# Altium PCB PCBnew.PcbDoc (part 1 of 2)
Units mil, origin at the board's own origin, x right, y up, seen from the top; angles counter-clockwise.
Board outline 9000 x 6005 mil, 4 copper layers (Top Layer, Power, Ground, Bottom Layer); 260 components, 178 nets, 1017 pads, 903 vias.
Unrouted connection lines stored in the file: 485.
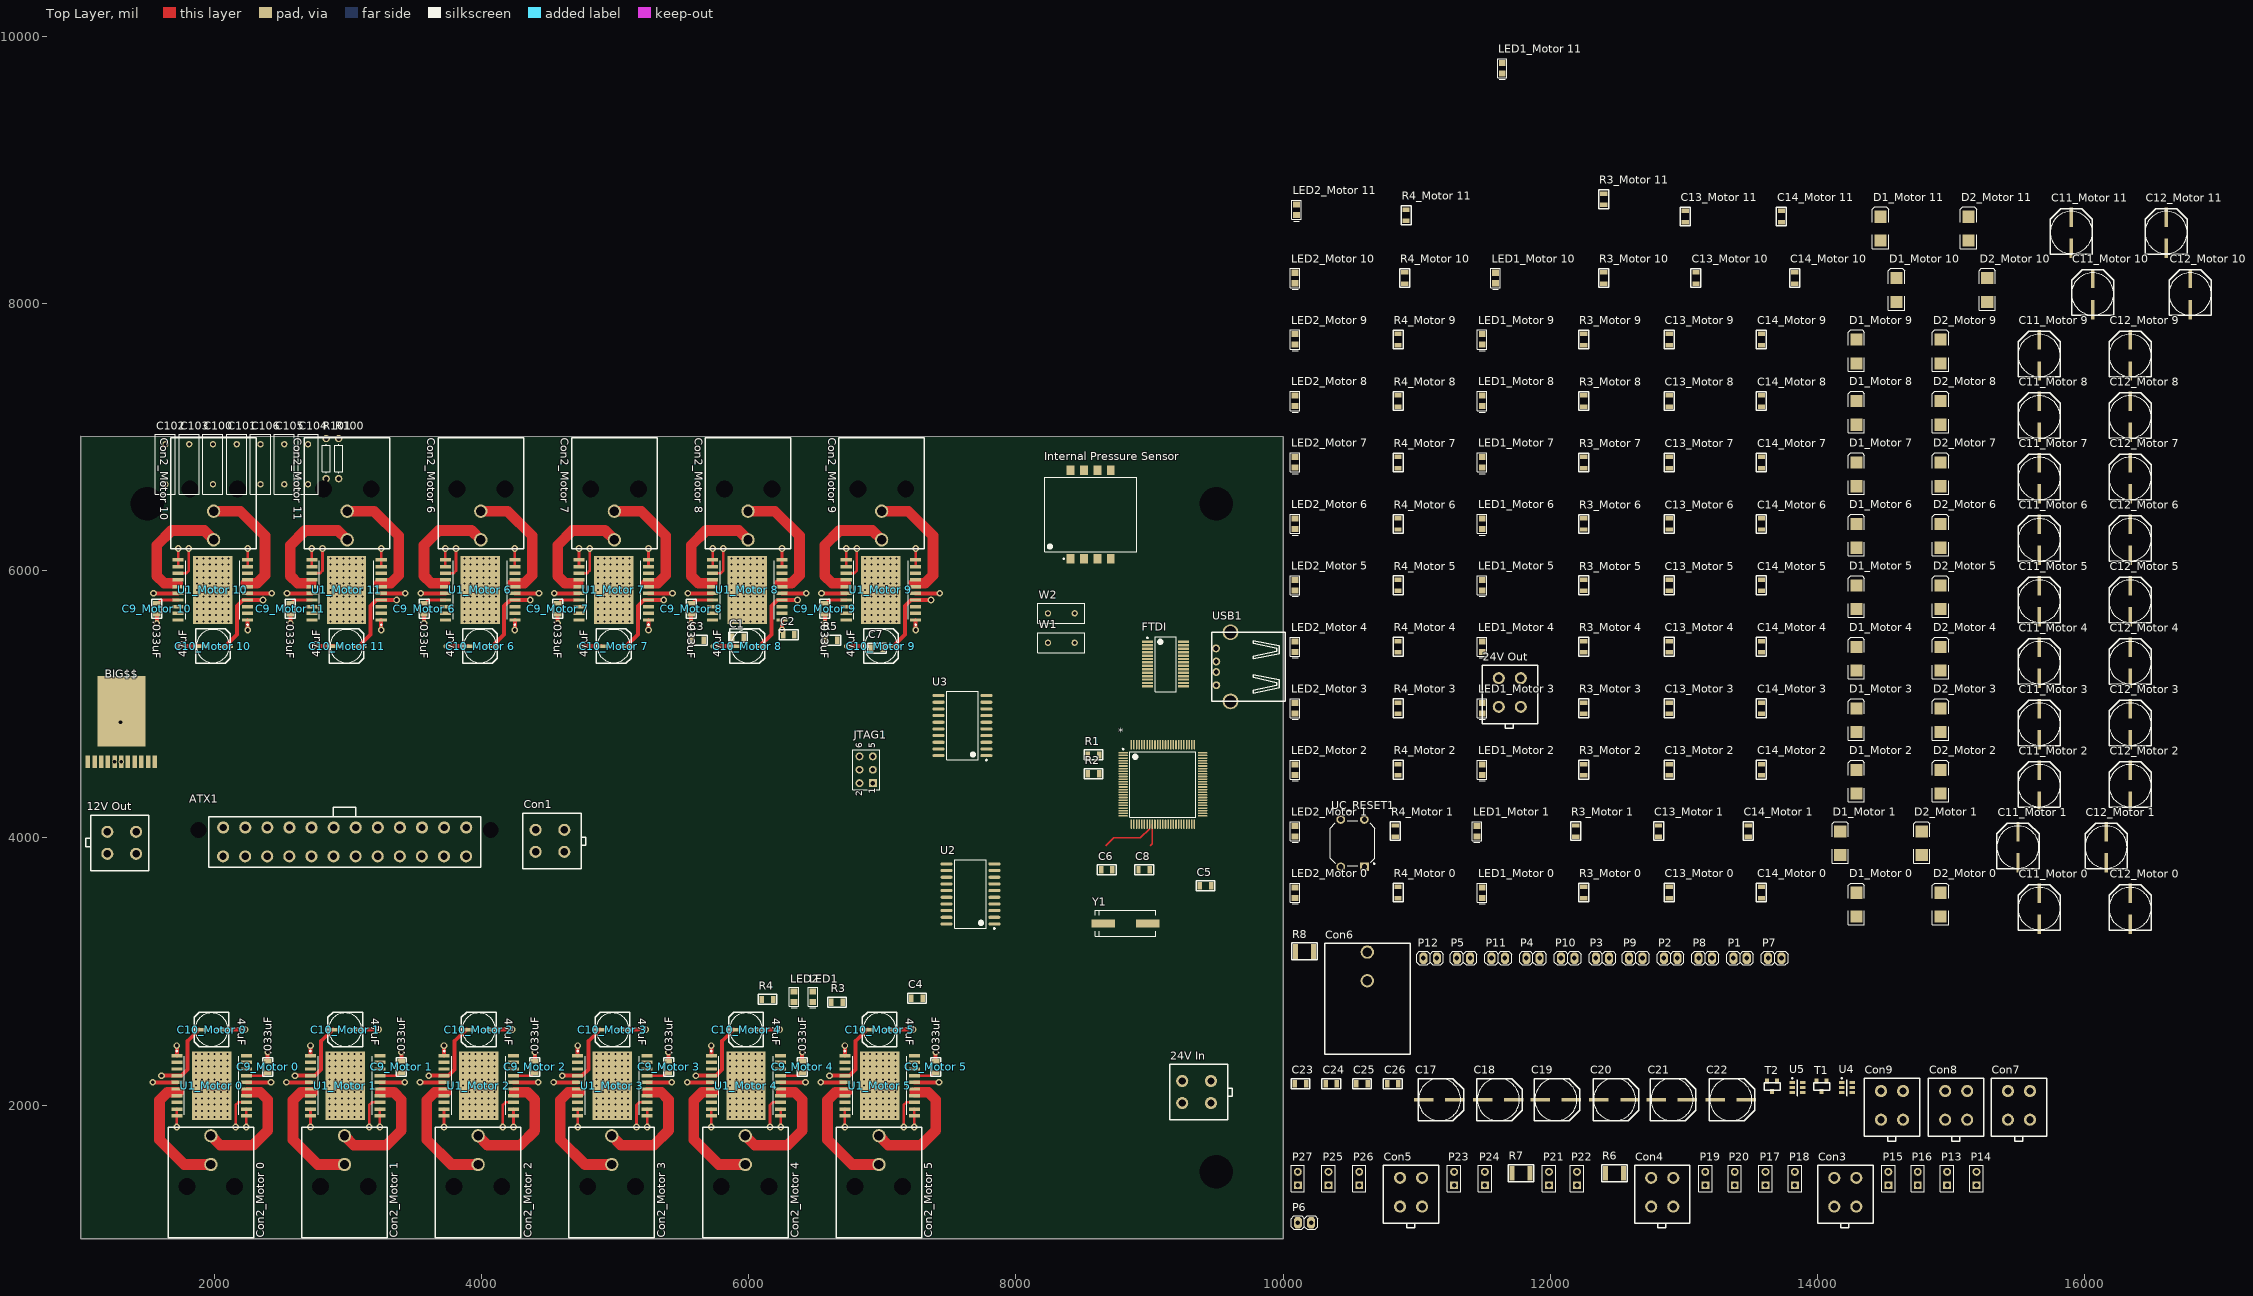
[diagram p0: Top Layer view]
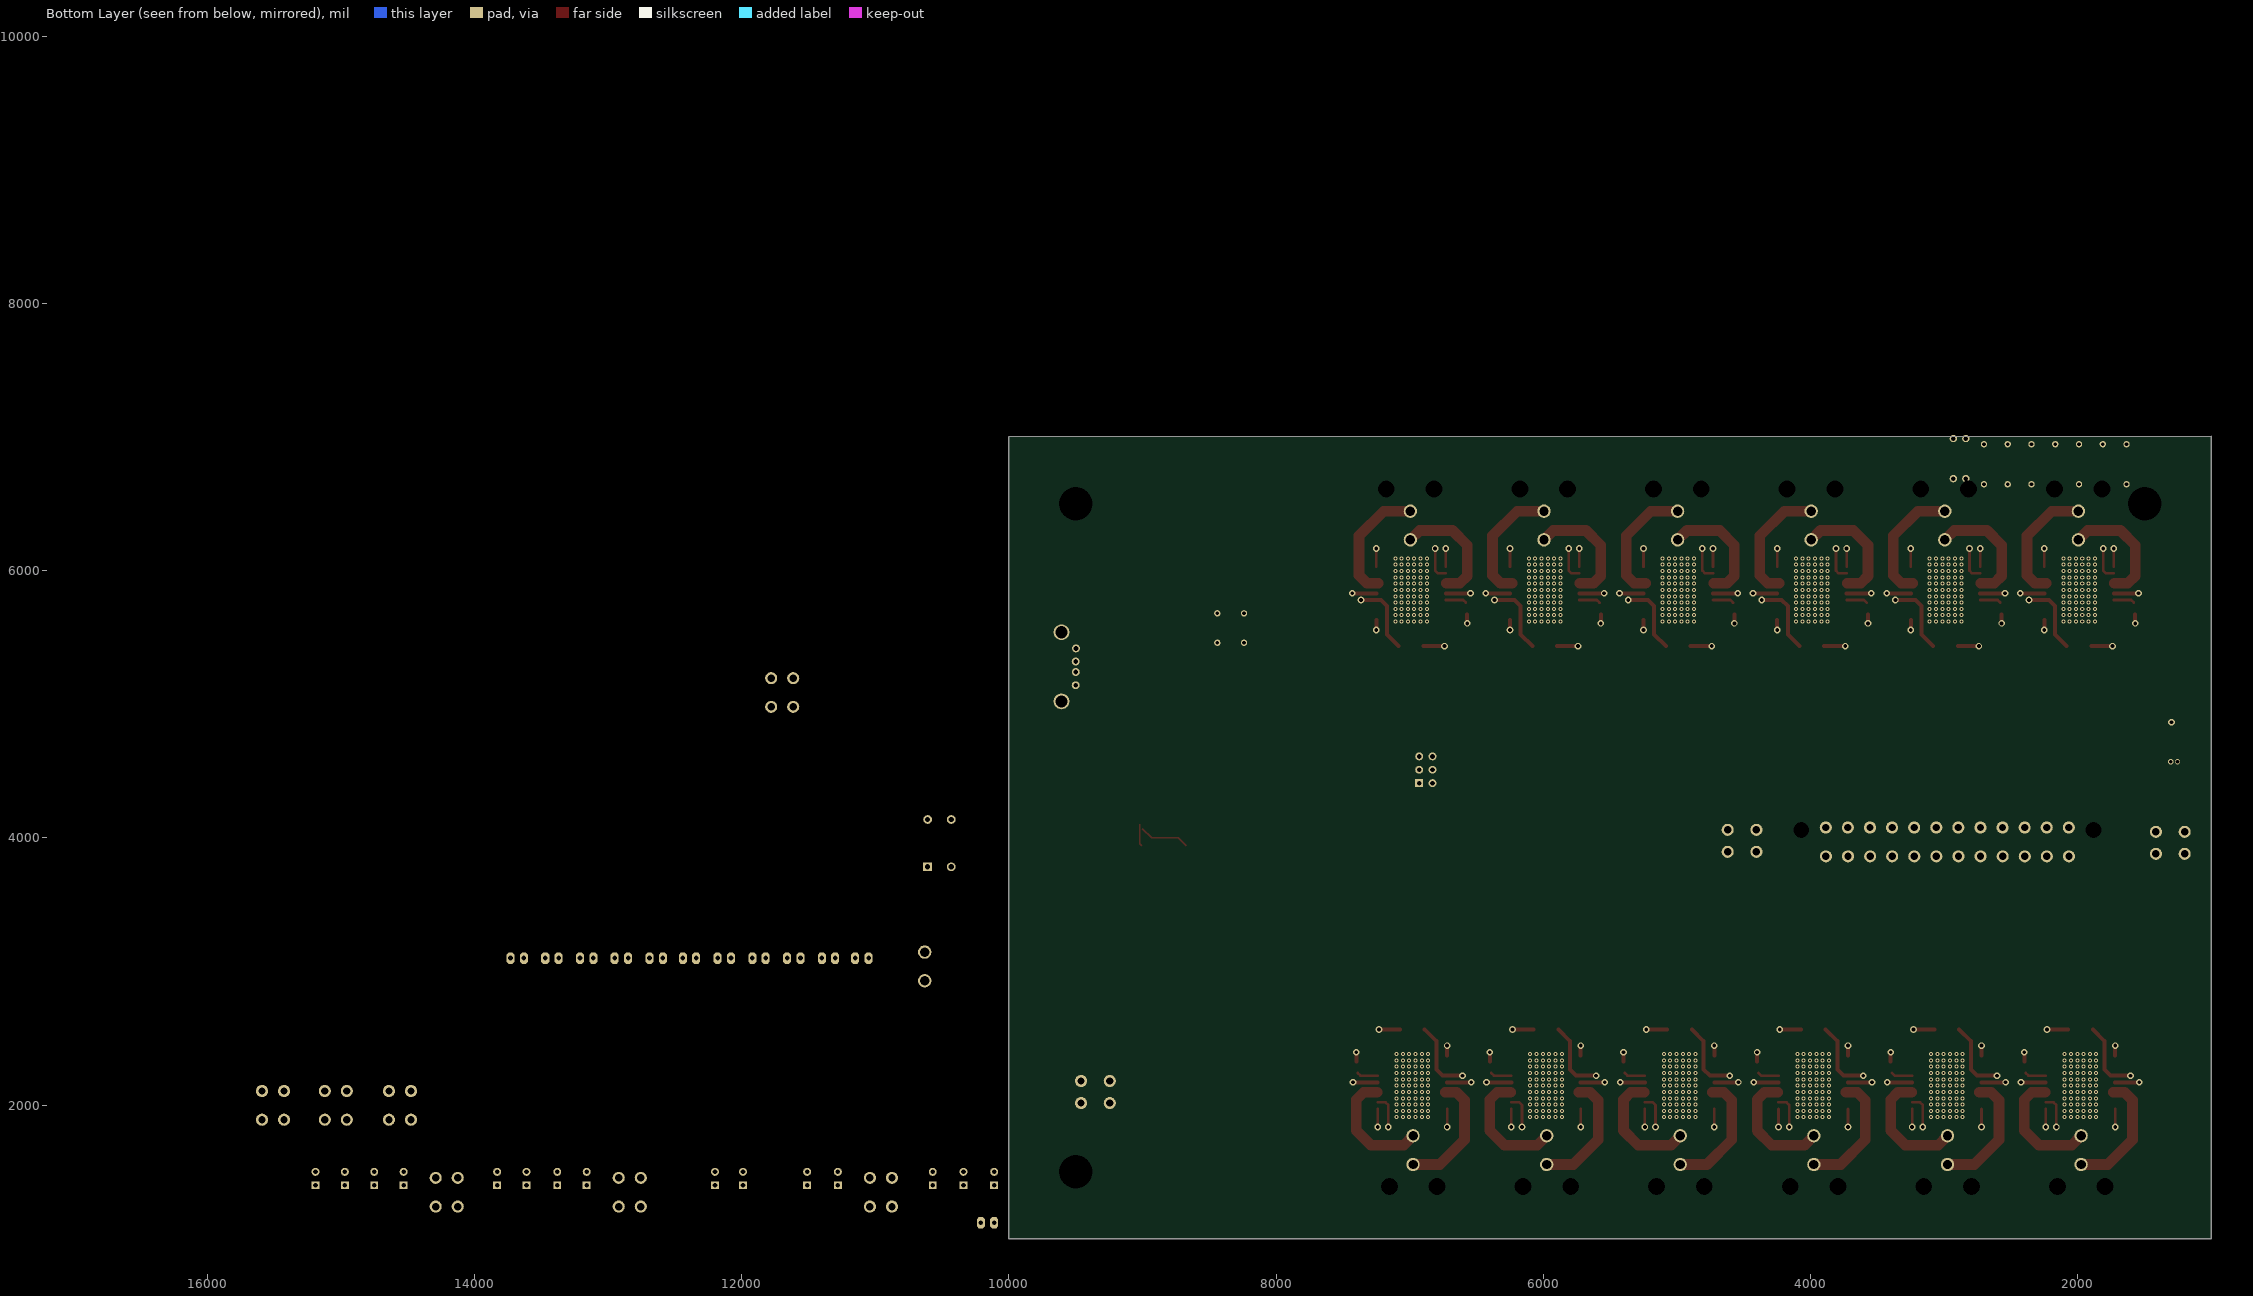
[diagram p1: Bottom Layer view, seen from below]
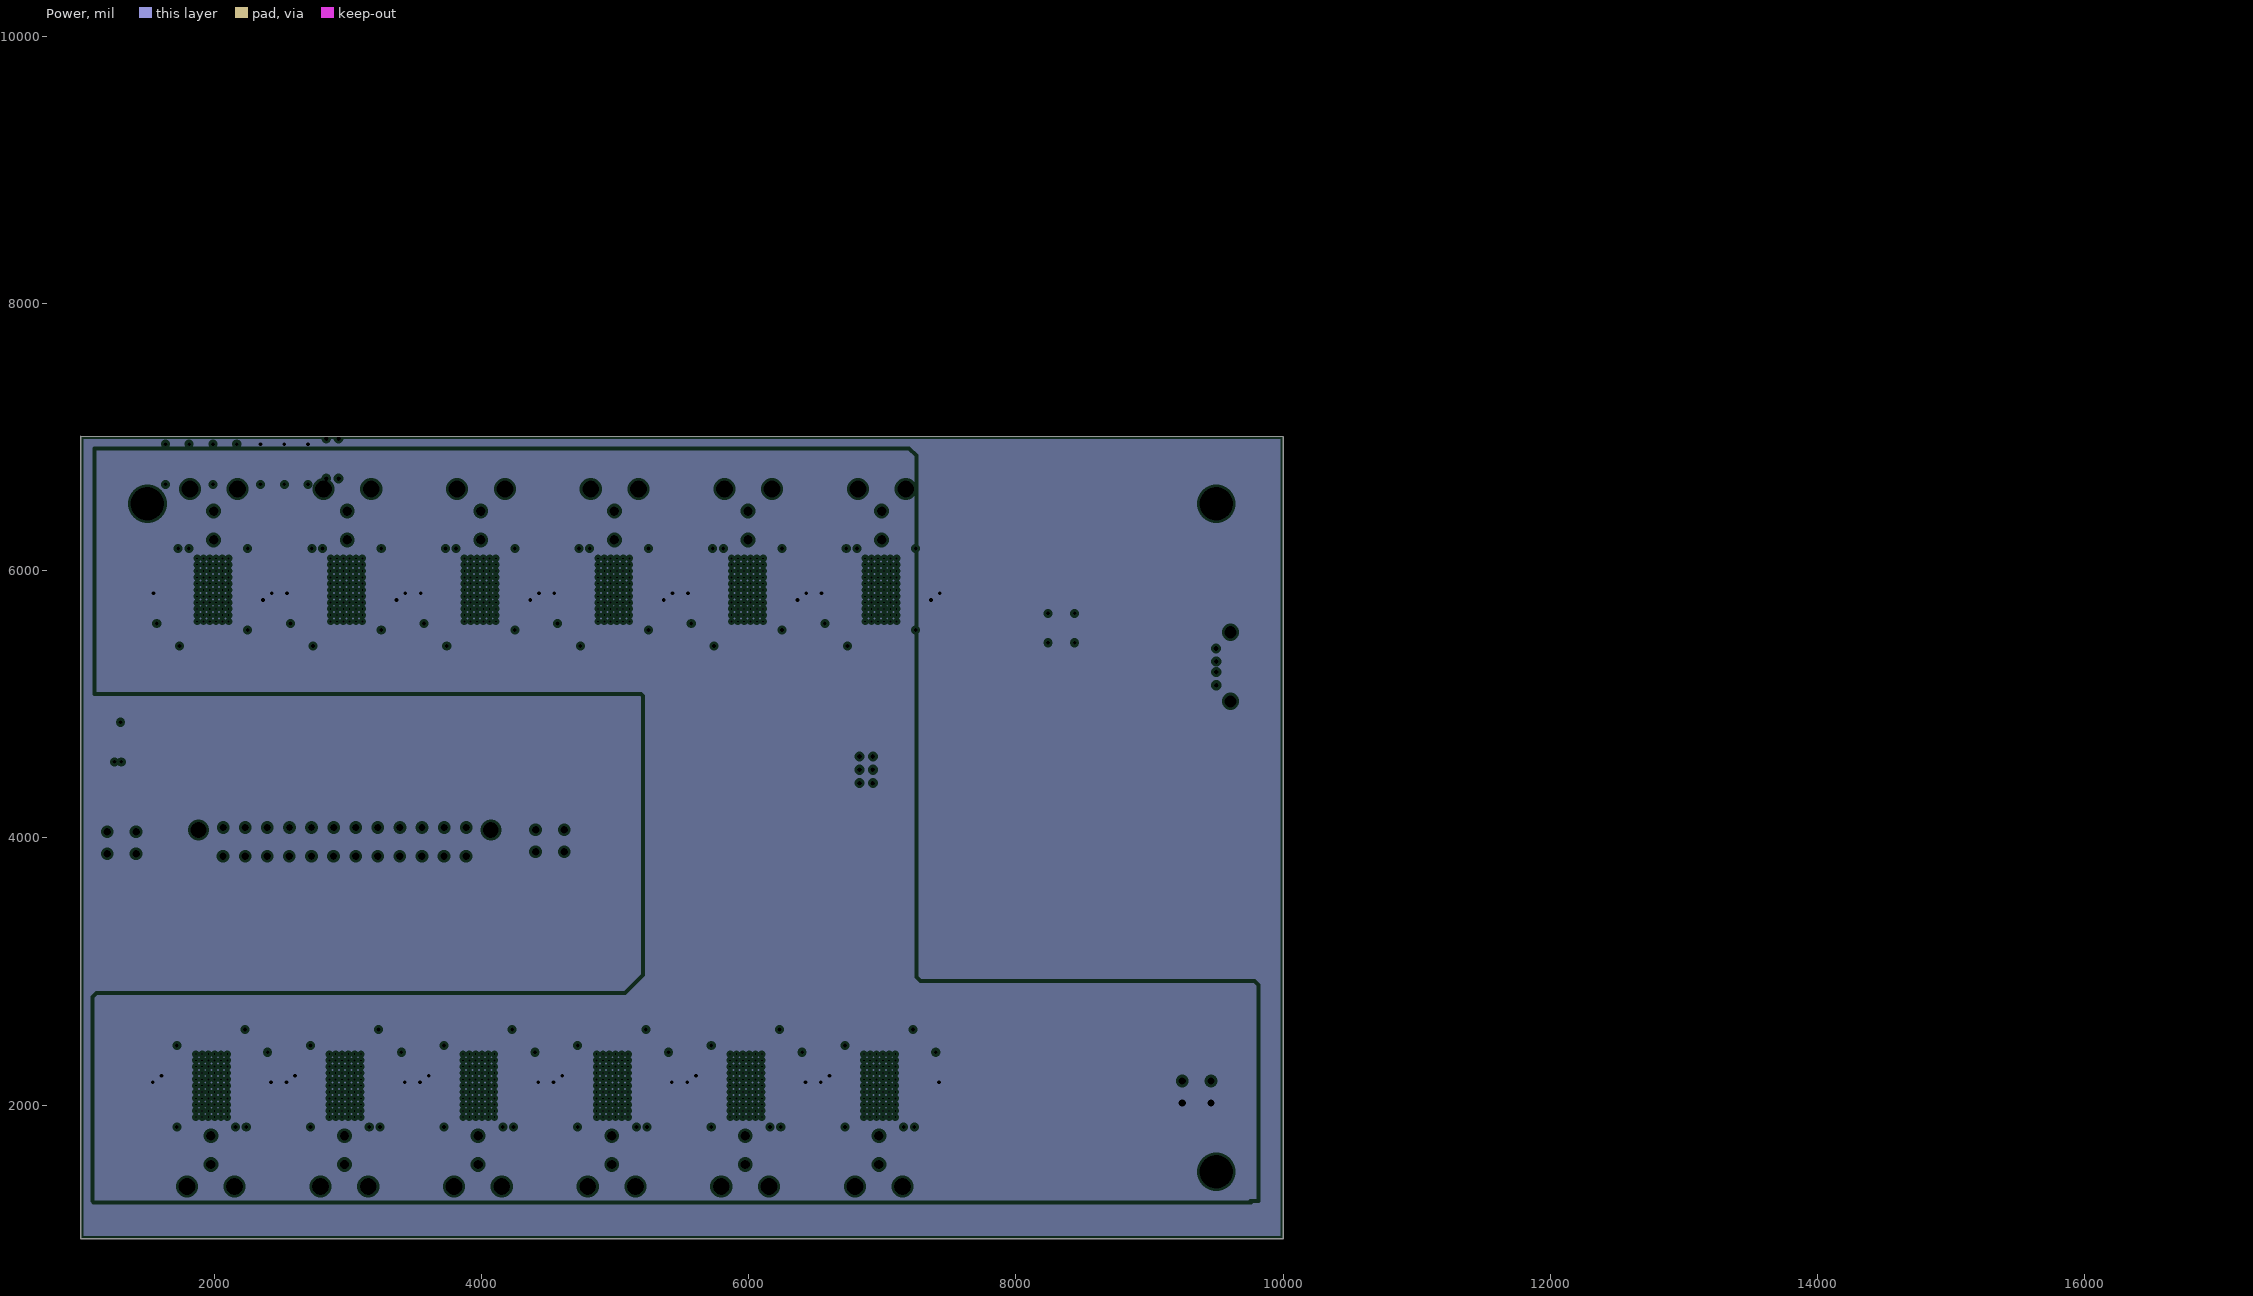
[diagram p2: Power, clearances drawn from the general rule]
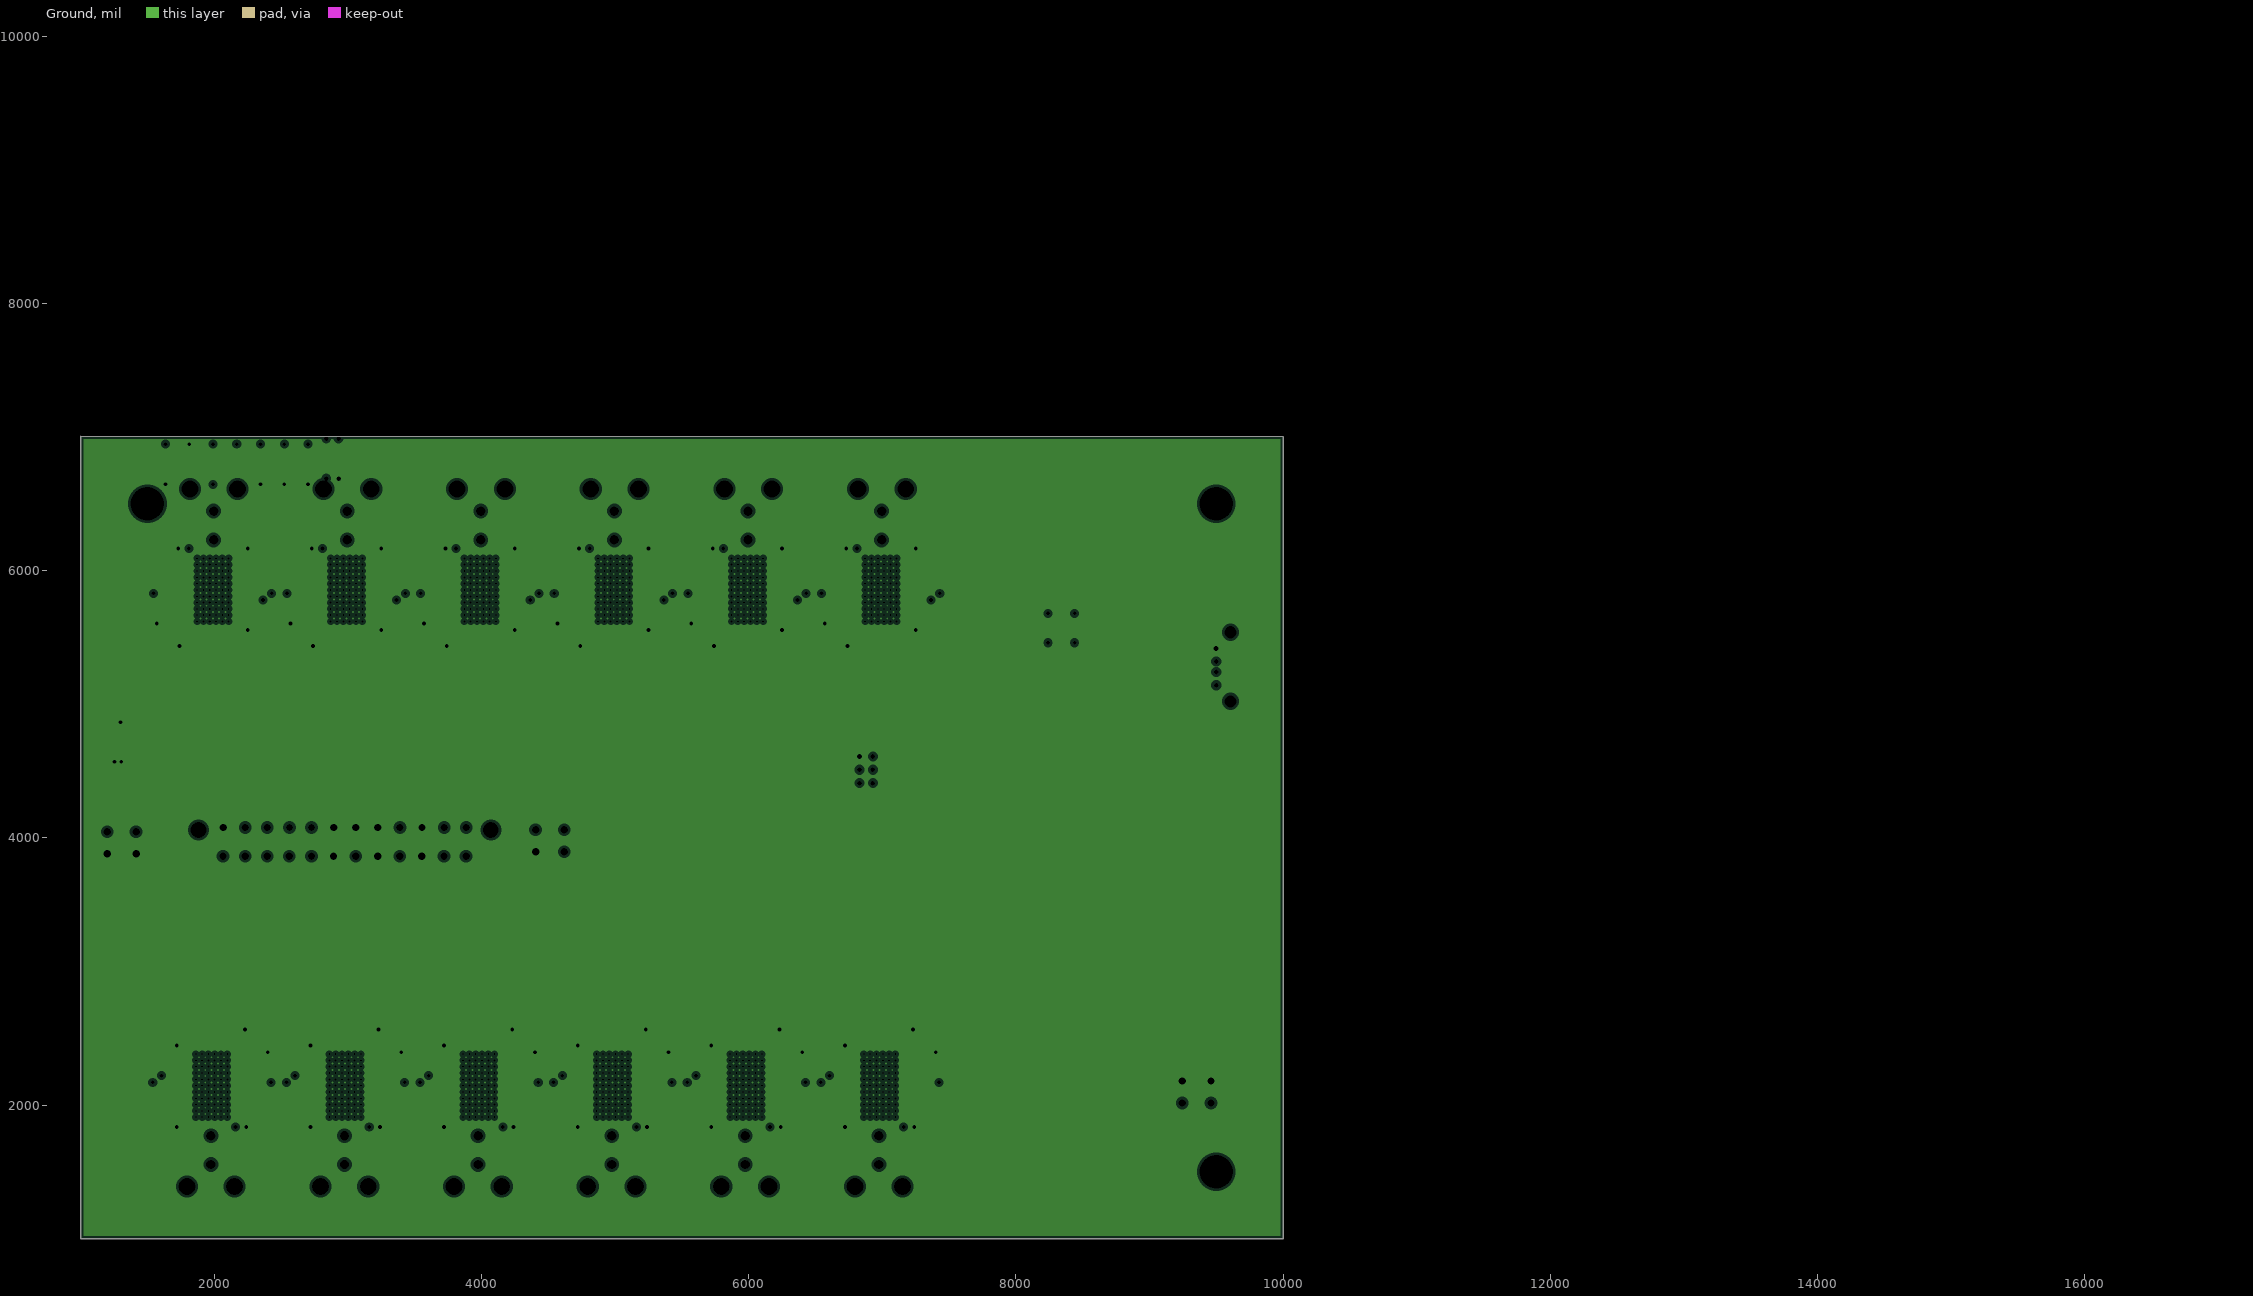
[diagram p3: Ground, clearances drawn from the general rule]

## Layer stack, top to bottom
Top Layer: signal copper 1.4
Dielectric: core 12.6, FR-4, Dk 4.8
Power: plane copper 1.4, net +24V
Dielectric: prepreg 12.6, FR-4, Dk 4.8
Ground: plane copper 1.4, net GND
Dielectric: core 12.6, FR-4, Dk 4.8
Bottom Layer: signal copper 1.4

## Board outline
1000,1000 10000,1000 10000,7000 1000,7005

## Design rules (kind name [scope] priority, off if disabled: settings)
Clearance [All] p1: gap=6
FabricationTestPointUsage TestPointUsage [All] p1: valid=0 allowmultiple=FALSE
FabricationTestpoint Testpoint [All] p1: side=3 testpointundercomponent=TRUE minsize=40 maxsize=100 preferedsize=60 minholesize=0 maxholesize=40 preferedholesize=32 testpointgrid=1 allowsidetop=TRUE allowsidebottom=TRUE usegrid=TRUE gridtolerance=0.01
MinimumAnnularRing [All] p1: minimumring=7.5
MinimumSolderMaskSliver [All] p1: minsoldermaskwidth=6
PlaneClearance [All] p1: clearance=20
PlaneConnect [All] p1: planeconnectstyle=Relief reliefexpansion=20 reliefentries=4 reliefconductorwidth=10 reliefairgap=10
PolygonConnect [All] p1: connectstyle=Relief reliefconductorwidth=10 reliefentries=4 polygonreliefangle="90 Angle"
RoomDefinition "Power Path Controllers" [InComponentClass('Power Path Controllers')] p1: confinementstyle=ConfineIn formatcopy=TRUE lockcomponents=FALSE outline 10050,1720 15730,1720 15730,2320 10050,2320
RoomDefinition "Motor 8" [InComponentClass('Motor 8')] p2: confinementstyle=ConfineIn formatcopy=TRUE lockcomponents=FALSE outline 5500,5270 6470,5270 6470,7000 5500,7000
RoomDefinition "Voltage Regulation" [InComponentClass('Voltage Regulation')] p3: confinementstyle=ConfineIn formatcopy=TRUE lockcomponents=FALSE outline 984,2870 10186,2870 10186,7045 984,7045
RoomDefinition "Top Level Schematic" [InComponentClass('Top Level Schematic')] p4: confinementstyle=ConfineIn formatcopy=TRUE lockcomponents=FALSE outline 9695,1380 9920,1380 9920,2535 9695,2535
RoomDefinition "Motor 11" [InComponentClass('Motor 11')] p5: confinementstyle=ConfineIn formatcopy=TRUE lockcomponents=FALSE outline 2500,5270 3470,5270 3470,7000 2500,7000
RoomDefinition "Motor 10" [InComponentClass('Motor 10')] p6: confinementstyle=ConfineIn formatcopy=TRUE lockcomponents=FALSE outline 1500,5270 2470,5270 2470,7000 1500,7000
RoomDefinition "Motor 9" [InComponentClass('Motor 9')] p7: confinementstyle=ConfineIn formatcopy=TRUE lockcomponents=FALSE outline 6500,5270 7470,5270 7470,7000 6500,7000
RoomDefinition "Motor 7" [InComponentClass('Motor 7')] p8: confinementstyle=ConfineIn formatcopy=TRUE lockcomponents=FALSE outline 4500,5270 5470,5270 5470,7000 4500,7000
RoomDefinition "Motor 6" [InComponentClass('Motor 6')] p9: confinementstyle=ConfineIn formatcopy=TRUE lockcomponents=FALSE outline 3500,5270 4470,5270 4470,7000 3500,7000
RoomDefinition "Motor 5" [InComponentClass('Motor 5')] p10: confinementstyle=ConfineIn formatcopy=TRUE lockcomponents=FALSE outline 7470,2730 6500,2730 6500,1000 7470,1000
RoomDefinition "Motor 4" [InComponentClass('Motor 4')] p11: confinementstyle=ConfineIn formatcopy=TRUE lockcomponents=FALSE outline 6470,2730 5500,2730 5500,1000 6470,1000
RoomDefinition "Motor 3" [InComponentClass('Motor 3')] p12: confinementstyle=ConfineIn formatcopy=TRUE lockcomponents=FALSE outline 5470,2730 4500,2730 4500,1000 5470,1000
RoomDefinition "Motor 2" [InComponentClass('Motor 2')] p13: confinementstyle=ConfineIn formatcopy=TRUE lockcomponents=FALSE outline 4470,2730 3500,2730 3500,1000 4470,1000
RoomDefinition "Motor 1" [InComponentClass('Motor 1')] p14: confinementstyle=ConfineIn formatcopy=TRUE lockcomponents=FALSE outline 3470,2730 2500,2730 2500,1000 3470,1000
RoomDefinition "Motor 0" [InComponentClass('Motor 0')] p15: confinementstyle=ConfineIn formatcopy=TRUE lockcomponents=FALSE outline 2470,2730 1500,2730 1500,1000 2470,1000
RoomDefinition Microcontroller [InComponentClass('Microcontroller')] p16: confinementstyle=ConfineIn formatcopy=TRUE lockcomponents=FALSE outline 883,2920 10164,2920 10164,7167 883,7167
RoutingVias [All] p1: holewidth=28 width=50 viastyle="Through Hole" minholewidth=15 minwidth=30 maxholewidth=30 maxwidth=50
SilkscreenOverComponentPads [All] p1: minsilkscreentomaskgap=10
SolderMaskExpansion [All] p1: expansion=4
Width [All] p1: maxlimit=1000 minlimit=6 preferedwidth=10
22 further rules are at their usual default settings.

## Classes and differential pairs
component class "Power Path Controllers": C15 C16 C17 C18 C19 C20 C21 C22 C23 C24 C25 C26 Con7 Con8 Con9 D3 R9 R10 T1 T2 U4 U5
component class "Motor 2": "C9_Motor 2" "C10_Motor 2" "C11_Motor 2" "C12_Motor 2" "C13_Motor 2" "C14_Motor 2" "Con2_Motor 2" "D1_Motor 2" "D2_Motor 2" "LED1_Motor 2" "LED2_Motor 2" "R3_Motor 2" "R4_Motor 2" "U1_Motor 2"
component class "Motor 1": "C9_Motor 1" "C10_Motor 1" "C11_Motor 1" "C12_Motor 1" "C13_Motor 1" "C14_Motor 1" "Con2_Motor 1" "D1_Motor 1" "D2_Motor 1" "LED1_Motor 1" "LED2_Motor 1" "R3_Motor 1" "R4_Motor 1" "U1_Motor 1"
component class "Motor 0": "C9_Motor 0" "C10_Motor 0" "C11_Motor 0" "C12_Motor 0" "C13_Motor 0" "C14_Motor 0" "Con2_Motor 0" "D1_Motor 0" "D2_Motor 0" "LED1_Motor 0" "LED2_Motor 0" "R3_Motor 0" "R4_Motor 0" "U1_Motor 0"
component class Microcontroller: * C1 C2 C3 C4 C5 C6 C7 C8 Con1 Con3 Con4 Con5 FTDI "Internal Pressure Sensor" JTAG1 LED1 LED2 P13 P14 P15 P16 P17 P18 P19 P20 P21 P22 P23 P24 P25 P26 P27 R1 R2 R3 R4 R5 R6 R7 U2 U3 UC_RESET1 USB1 Y1
component class "Motor 3": "C9_Motor 3" "C10_Motor 3" "C11_Motor 3" "C12_Motor 3" "C13_Motor 3" "C14_Motor 3" "Con2_Motor 3" "D1_Motor 3" "D2_Motor 3" "LED1_Motor 3" "LED2_Motor 3" "R3_Motor 3" "R4_Motor 3" "U1_Motor 3"
component class "Motor 4": "C9_Motor 4" "C10_Motor 4" "C11_Motor 4" "C12_Motor 4" "C13_Motor 4" "C14_Motor 4" "Con2_Motor 4" "D1_Motor 4" "D2_Motor 4" "LED1_Motor 4" "LED2_Motor 4" "R3_Motor 4" "R4_Motor 4" "U1_Motor 4"
component class "Motor 5": "C9_Motor 5" "C10_Motor 5" "C11_Motor 5" "C12_Motor 5" "C13_Motor 5" "C14_Motor 5" "Con2_Motor 5" "D1_Motor 5" "D2_Motor 5" "LED1_Motor 5" "LED2_Motor 5" "R3_Motor 5" "R4_Motor 5" "U1_Motor 5"
component class "Motor 6": "C9_Motor 6" "C10_Motor 6" "C11_Motor 6" "C12_Motor 6" "C13_Motor 6" "C14_Motor 6" "Con2_Motor 6" "D1_Motor 6" "D2_Motor 6" "LED1_Motor 6" "LED2_Motor 6" "R3_Motor 6" "R4_Motor 6" "U1_Motor 6"
component class "Motor 7": "C9_Motor 7" "C10_Motor 7" "C11_Motor 7" "C12_Motor 7" "C13_Motor 7" "C14_Motor 7" "Con2_Motor 7" "D1_Motor 7" "D2_Motor 7" "LED1_Motor 7" "LED2_Motor 7" "R3_Motor 7" "R4_Motor 7" "U1_Motor 7"
component class "Motor 8": "C9_Motor 8" "C10_Motor 8" "C11_Motor 8" "C12_Motor 8" "C13_Motor 8" "C14_Motor 8" "Con2_Motor 8" "D1_Motor 8" "D2_Motor 8" "LED1_Motor 8" "LED2_Motor 8" "R3_Motor 8" "R4_Motor 8" "U1_Motor 8"
component class "Motor 9": "C9_Motor 9" "C10_Motor 9" "C11_Motor 9" "C12_Motor 9" "C13_Motor 9" "C14_Motor 9" "Con2_Motor 9" "D1_Motor 9" "D2_Motor 9" "LED1_Motor 9" "LED2_Motor 9" "R3_Motor 9" "R4_Motor 9" "U1_Motor 9"
component class "Motor 10": "C9_Motor 10" "C10_Motor 10" "C11_Motor 10" "C12_Motor 10" "C13_Motor 10" "C14_Motor 10" "Con2_Motor 10" "D1_Motor 10" "D2_Motor 10" "LED1_Motor 10" "LED2_Motor 10" "R3_Motor 10" "R4_Motor 10" "U1_Motor 10"
component class "Motor 11": "C9_Motor 11" "C10_Motor 11" "C11_Motor 11" "C12_Motor 11" "C13_Motor 11" "C14_Motor 11" "Con2_Motor 11" "D1_Motor 11" "D2_Motor 11" "LED1_Motor 11" "LED2_Motor 11" "R3_Motor 11" "R4_Motor 11" "U1_Motor 11"
component class "Top Level Schematic": Con6 R8 W1 W2
component class "Voltage Regulation": "12V Out" "24V In" "24V Out" ATX1 BIG$$ C100 C101 C102 C103 C104 C105 C106 P1 P2 P3 P4 P5 P6 P7 P8 P9 P10 P11 P12 R100 R101
net class DIR[11..0]: DIR0 DIR1 DIR2 DIR3 DIR4 DIR5 DIR6 DIR7 DIR8 DIR9 DIR10 DIR11 DIR12
net class PWM[11..0]: PWM0 PWM1 PWM2 PWM3 PWM4 PWM5 PWM6 PWM7 PWM8 PWM9 PWM10 PWM11
channel class "Motor Controllers": "Motor 0" "Motor 1" "Motor 2" "Motor 3" "Motor 4" "Motor 5" "Motor 6" "Motor 7" "Motor 8" "Motor 9" "Motor 10" "Motor 11"

## Components (designator, comment, footprint, x,y, rotation, side; value= is the part's Value field where it differs from the comment)
"12V Out" "5566-4" 5566-4 1200,3960 r270 top
"24V In" "5566-4" 5566-4 9460,2100 r90 top
"24V Out" "5566-4" 5566-4 11699,4980 r0 top
* "ATMEGA1280 UC" TSQFP50P1600X1600X120-100N 9100,4400 r0 top
ATX1 "M3-ATX" "24-POS 5566" 1960,3780 r0 top
BIG$$ "LMZ23610" LMZ23610 266.9,4175.13 r0 top
C1 "Cap" "0805 (2012) Capacitor" 5920,5500 r0 top
C2 "Cap" "0805 (2012) Capacitor" 6300,5520 r0 top
C3 "Cap" "0805 (2012) Capacitor" 5620,5480 r0 top
C4 "100nF" "0805 (2012) Capacitor" 7260,2800 r0 top
C5 "100nF" "0805 (2012) Capacitor" 9420,3640 r180 top
C6 "Cap" "0805 (2012) Capacitor" 8680,3760 r180 top
C7 "Cap" "0805 (2012) Capacitor" 6960,5420 r0 top
C8 "Cap" "0805 (2012) Capacitor" 8960,3760 r180 top
"C9_Motor 0" ".033uF" "0805 (2012) Capacitor" 2400,2285 r270 top (schematic designator C9)
"C9_Motor 1" ".033uF" "0805 (2012) Capacitor" 3400,2285 r270 top (schematic designator C9)
"C9_Motor 2" ".033uF" "0805 (2012) Capacitor" 4400,2285 r270 top (schematic designator C9)
"C9_Motor 3" ".033uF" "0805 (2012) Capacitor" 5400,2285 r270 top (schematic designator C9)
"C9_Motor 4" ".033uF" "0805 (2012) Capacitor" 6400,2285 r270 top (schematic designator C9)
"C9_Motor 5" ".033uF" "0805 (2012) Capacitor" 7400,2285 r270 top (schematic designator C9)
"C9_Motor 6" ".033uF" "0805 (2012) Capacitor" 3570,5715 r90 top (schematic designator C9)
"C9_Motor 7" ".033uF" "0805 (2012) Capacitor" 4570,5715 r90 top (schematic designator C9)
"C9_Motor 8" ".033uF" "0805 (2012) Capacitor" 5570,5715 r90 top (schematic designator C9)
"C9_Motor 9" ".033uF" "0805 (2012) Capacitor" 6570,5715 r90 top (schematic designator C9)
"C9_Motor 10" ".033uF" "0805 (2012) Capacitor" 1570,5715 r90 top (schematic designator C9)
"C9_Motor 11" ".033uF" "0805 (2012) Capacitor" 2570,5715 r90 top (schematic designator C9)
"C10_Motor 0" "47uF" Radial_6.3mmDia_SM_D 1980,2565 r180 top (schematic designator C10)
"C10_Motor 1" "47uF" Radial_6.3mmDia_SM_D 2980,2565 r180 top (schematic designator C10)
"C10_Motor 2" "47uF" Radial_6.3mmDia_SM_D 3980,2565 r180 top (schematic designator C10)
"C10_Motor 3" "47uF" Radial_6.3mmDia_SM_D 4980,2565 r180 top (schematic designator C10)
"C10_Motor 4" "47uF" Radial_6.3mmDia_SM_D 5980,2565 r180 top (schematic designator C10)
"C10_Motor 5" "47uF" Radial_6.3mmDia_SM_D 6980,2565 r180 top (schematic designator C10)
"C10_Motor 6" "47uF" Radial_6.3mmDia_SM_D 3990,5435 r0 top (schematic designator C10)
"C10_Motor 7" "47uF" Radial_6.3mmDia_SM_D 4990,5435 r0 top (schematic designator C10)
"C10_Motor 8" "47uF" Radial_6.3mmDia_SM_D 5990,5435 r0 top (schematic designator C10)
"C10_Motor 9" "47uF" Radial_6.3mmDia_SM_D 6990,5435 r0 top (schematic designator C10)
"C10_Motor 10" "47uF" Radial_6.3mmDia_SM_D 1990,5435 r0 top (schematic designator C10)
"C10_Motor 11" "47uF" Radial_6.3mmDia_SM_D 2990,5435 r0 top (schematic designator C10)
"C11_Motor 0" "6.8uF" Radial_8mmDia_SM_E 15660,3470 r90 top (schematic designator C11)
"C11_Motor 1" "6.8uF" Radial_8mmDia_SM_E 15500,3930 r90 top (schematic designator C11)
"C11_Motor 2" "6.8uF" Radial_8mmDia_SM_E 15660,4390 r90 top (schematic designator C11)
"C11_Motor 3" "6.8uF" Radial_8mmDia_SM_E 15660,4850 r90 top (schematic designator C11)
"C11_Motor 4" "6.8uF" Radial_8mmDia_SM_E 15660,5310 r90 top (schematic designator C11)
"C11_Motor 5" "6.8uF" Radial_8mmDia_SM_E 15660,5770 r90 top (schematic designator C11)
"C11_Motor 6" "6.8uF" Radial_8mmDia_SM_E 15660,6230 r90 top (schematic designator C11)
"C11_Motor 7" "6.8uF" Radial_8mmDia_SM_E 15660,6690 r90 top (schematic designator C11)
"C11_Motor 8" "6.8uF" Radial_8mmDia_SM_E 15660,7150 r90 top (schematic designator C11)
"C11_Motor 9" "6.8uF" Radial_8mmDia_SM_E 15660,7610 r90 top (schematic designator C11)
"C11_Motor 10" "6.8uF" Radial_8mmDia_SM_E 16060,8070 r90 top (schematic designator C11)
"C11_Motor 11" "6.8uF" Radial_8mmDia_SM_E 15900,8530 r90 top (schematic designator C11)
"C12_Motor 0" "6.8uF" Radial_8mmDia_SM_E 16340,3470 r90 top (schematic designator C12)
"C12_Motor 1" "6.8uF" Radial_8mmDia_SM_E 16160,3930 r90 top (schematic designator C12)
"C12_Motor 2" "6.8uF" Radial_8mmDia_SM_E 16340,4390 r90 top (schematic designator C12)
"C12_Motor 3" "6.8uF" Radial_8mmDia_SM_E 16340,4850 r90 top (schematic designator C12)
"C12_Motor 4" "6.8uF" Radial_8mmDia_SM_E 16340,5310 r90 top (schematic designator C12)
"C12_Motor 5" "6.8uF" Radial_8mmDia_SM_E 16340,5770 r90 top (schematic designator C12)
"C12_Motor 6" "6.8uF" Radial_8mmDia_SM_E 16340,6230 r90 top (schematic designator C12)
"C12_Motor 7" "6.8uF" Radial_8mmDia_SM_E 16340,6690 r90 top (schematic designator C12)
"C12_Motor 8" "6.8uF" Radial_8mmDia_SM_E 16340,7150 r90 top (schematic designator C12)
"C12_Motor 9" "6.8uF" Radial_8mmDia_SM_E 16340,7610 r90 top (schematic designator C12)
"C12_Motor 10" "6.8uF" Radial_8mmDia_SM_E 16790,8070 r90 top (schematic designator C12)
"C12_Motor 11" "6.8uF" Radial_8mmDia_SM_E 16610,8530 r90 top (schematic designator C12)
"C13_Motor 0" ".1uF" "0805 (2012) Capacitor" 12890,3590 r90 top (schematic designator C13)
"C13_Motor 1" ".1uF" "0805 (2012) Capacitor" 12810,4050 r90 top (schematic designator C13)
"C13_Motor 2" ".1uF" "0805 (2012) Capacitor" 12890,4510 r90 top (schematic designator C13)
"C13_Motor 3" ".1uF" "0805 (2012) Capacitor" 12890,4970 r90 top (schematic designator C13)
"C13_Motor 4" ".1uF" "0805 (2012) Capacitor" 12890,5430 r90 top (schematic designator C13)
"C13_Motor 5" ".1uF" "0805 (2012) Capacitor" 12890,5890 r90 top (schematic designator C13)
"C13_Motor 6" ".1uF" "0805 (2012) Capacitor" 12890,6350 r90 top (schematic designator C13)
"C13_Motor 7" ".1uF" "0805 (2012) Capacitor" 12890,6810 r90 top (schematic designator C13)
"C13_Motor 8" ".1uF" "0805 (2012) Capacitor" 12890,7270 r90 top (schematic designator C13)
"C13_Motor 9" ".1uF" "0805 (2012) Capacitor" 12890,7730 r90 top (schematic designator C13)
"C13_Motor 10" ".1uF" "0805 (2012) Capacitor" 13090,8190 r90 top (schematic designator C13)
"C13_Motor 11" ".1uF" "0805 (2012) Capacitor" 13010,8650 r90 top (schematic designator C13)
"C14_Motor 0" ".1uF" "0805 (2012) Capacitor" 13580,3590 r90 top (schematic designator C14)
"C14_Motor 1" ".1uF" "0805 (2012) Capacitor" 13480,4050 r90 top (schematic designator C14)
"C14_Motor 2" ".1uF" "0805 (2012) Capacitor" 13580,4510 r90 top (schematic designator C14)
"C14_Motor 3" ".1uF" "0805 (2012) Capacitor" 13580,4970 r90 top (schematic designator C14)
"C14_Motor 4" ".1uF" "0805 (2012) Capacitor" 13580,5430 r90 top (schematic designator C14)
"C14_Motor 5" ".1uF" "0805 (2012) Capacitor" 13580,5890 r90 top (schematic designator C14)
"C14_Motor 6" ".1uF" "0805 (2012) Capacitor" 13580,6350 r90 top (schematic designator C14)
"C14_Motor 7" ".1uF" "0805 (2012) Capacitor" 13580,6810 r90 top (schematic designator C14)
"C14_Motor 8" ".1uF" "0805 (2012) Capacitor" 13580,7270 r90 top (schematic designator C14)
"C14_Motor 9" ".1uF" "0805 (2012) Capacitor" 13580,7730 r90 top (schematic designator C14)
"C14_Motor 10" ".1uF" "0805 (2012) Capacitor" 13830,8190 r90 top (schematic designator C14)
"C14_Motor 11" ".1uF" "0805 (2012) Capacitor" 13730,8650 r90 top (schematic designator C14)
C17 "56uF" Radial_8mmDia_SM_E 11170,2040 r0 top
C18 "56uF" Radial_8mmDia_SM_E 11610,2040 r0 top
C19 "56uF" Radial_8mmDia_SM_E 12040,2040 r0 top
C20 "56uF" Radial_8mmDia_SM_E 12480,2040 r0 top
C21 "56uF" Radial_8mmDia_SM_E 12910,2040 r0 top
C22 "56uF" Radial_8mmDia_SM_E 13350,2040 r0 top
C23 "10uF" "0805 (2012) Capacitor" 10130,2160 r0 top
C24 "10uF" "0805 (2012) Capacitor" 10360,2160 r0 top
C25 "1uF" "0805 (2012) Capacitor" 10590,2160 r0 top
C26 "10uF" "0805 (2012) Capacitor" 10820,2160 r0 top
C100 "Cap" RAD-0.3 1990.54,6796.06 r90 top
C101 "Cap" RAD-0.3 2168.42,6796.06 r90 top
C102 "Cap" RAD-0.3 1634.8,6796.06 r90 top
C103 "Cap" RAD-0.3 1812.67,6796.06 r90 top
C104 "Cap" RAD-0.3 2702.04,6796.06 r90 top
C105 "Cap" RAD-0.3 2524.17,6796.06 r90 top
C106 "Cap" RAD-0.3 2346.29,6796.06 r90 top
Con1 "UART1" 5566-4 4620,3980 r90 top
"Con2_Motor 0" "5569 Motor+/-" "5569 Mini-Fit Jr 2-Pos Right Angle w/ PCB Mounting Flange" 1975,1555 r0 top (schematic designator Con2)
"Con2_Motor 1" "5569 Motor+/-" "5569 Mini-Fit Jr 2-Pos Right Angle w/ PCB Mounting Flange" 2975,1555 r0 top (schematic designator Con2)
"Con2_Motor 2" "5569 Motor+/-" "5569 Mini-Fit Jr 2-Pos Right Angle w/ PCB Mounting Flange" 3975,1555 r0 top (schematic designator Con2)
"Con2_Motor 3" "5569 Motor+/-" "5569 Mini-Fit Jr 2-Pos Right Angle w/ PCB Mounting Flange" 4975,1555 r0 top (schematic designator Con2)
"Con2_Motor 4" "5569 Motor+/-" "5569 Mini-Fit Jr 2-Pos Right Angle w/ PCB Mounting Flange" 5975,1555 r0 top (schematic designator Con2)
"Con2_Motor 5" "5569 Motor+/-" "5569 Mini-Fit Jr 2-Pos Right Angle w/ PCB Mounting Flange" 6975,1555 r0 top (schematic designator Con2)
"Con2_Motor 6" "5569 Motor+/-" "5569 Mini-Fit Jr 2-Pos Right Angle w/ PCB Mounting Flange" 3995,6445 r180 top (schematic designator Con2)
"Con2_Motor 7" "5569 Motor+/-" "5569 Mini-Fit Jr 2-Pos Right Angle w/ PCB Mounting Flange" 4995,6445 r180 top (schematic designator Con2)
"Con2_Motor 8" "5569 Motor+/-" "5569 Mini-Fit Jr 2-Pos Right Angle w/ PCB Mounting Flange" 5995,6445 r180 top (schematic designator Con2)
"Con2_Motor 9" "5569 Motor+/-" "5569 Mini-Fit Jr 2-Pos Right Angle w/ PCB Mounting Flange" 6995,6445 r180 top (schematic designator Con2)
"Con2_Motor 10" "5569 Motor+/-" "5569 Mini-Fit Jr 2-Pos Right Angle w/ PCB Mounting Flange" 1995,6445 r180 top (schematic designator Con2)
"Con2_Motor 11" "5569 Motor+/-" "5569 Mini-Fit Jr 2-Pos Right Angle w/ PCB Mounting Flange" 2995,6445 r180 top (schematic designator Con2)
Con3 "External Pressure" 5566-4 14210,1240 r0 top
Con4 "UART2" 5566-4 12840,1240 r0 top
Con5 "5566-4" 5566-4 10960,1240 r0 top
Con6 "Kill Switch" "5569 Mini-Fit Jr 2-Pos Right Angle w/ PCB Mounting Flange" 10630,2930 r0 top
Con7 "Ext. Power" 5566-4 15510,1890 r0 top
Con8 "Battery 1" 5566-4 15040,1890 r0 top
Con9 "Battery 2/Wall Power" 5566-4 14560,1890 r0 top
"D1_Motor 0" "1SMB26AT3" SMB 14290,3500 r90 top (schematic designator D1)
"D1_Motor 1" "1SMB26AT3" SMB 14170,3960 r90 top (schematic designator D1)
"D1_Motor 2" "1SMB26AT3" SMB 14290,4420 r90 top (schematic designator D1)
"D1_Motor 3" "1SMB26AT3" SMB 14290,4880 r90 top (schematic designator D1)
"D1_Motor 4" "1SMB26AT3" SMB 14290,5340 r90 top (schematic designator D1)
"D1_Motor 5" "1SMB26AT3" SMB 14290,5800 r90 top (schematic designator D1)
"D1_Motor 6" "1SMB26AT3" SMB 14290,6260 r90 top (schematic designator D1)
"D1_Motor 7" "1SMB26AT3" SMB 14290,6720 r90 top (schematic designator D1)
"D1_Motor 8" "1SMB26AT3" SMB 14290,7180 r90 top (schematic designator D1)
"D1_Motor 9" "1SMB26AT3" SMB 14290,7640 r90 top (schematic designator D1)
"D1_Motor 10" "1SMB26AT3" SMB 14590,8100 r90 top (schematic designator D1)
"D1_Motor 11" "1SMB26AT3" SMB 14470,8560 r90 top (schematic designator D1)
"D2_Motor 0" "1SMB26AT3" SMB 14920,3500 r90 top (schematic designator D2)
"D2_Motor 1" "1SMB26AT3" SMB 14780,3960 r90 top (schematic designator D2)
"D2_Motor 2" "1SMB26AT3" SMB 14920,4420 r90 top (schematic designator D2)
"D2_Motor 3" "1SMB26AT3" SMB 14920,4880 r90 top (schematic designator D2)
"D2_Motor 4" "1SMB26AT3" SMB 14920,5340 r90 top (schematic designator D2)
"D2_Motor 5" "1SMB26AT3" SMB 14920,5800 r90 top (schematic designator D2)
"D2_Motor 6" "1SMB26AT3" SMB 14920,6260 r90 top (schematic designator D2)
"D2_Motor 7" "1SMB26AT3" SMB 14920,6720 r90 top (schematic designator D2)
"D2_Motor 8" "1SMB26AT3" SMB 14920,7180 r90 top (schematic designator D2)
"D2_Motor 9" "1SMB26AT3" SMB 14920,7640 r90 top (schematic designator D2)
"D2_Motor 10" "1SMB26AT3" SMB 15270,8100 r90 top (schematic designator D2)
"D2_Motor 11" "1SMB26AT3" SMB 15130,8560 r90 top (schematic designator D2)
FTDI "FT232RL" SOP65P780X200-28N 9120,5300 r0 top
"Internal Pressure Sensor" "Internal Pressure" SOP254P1740X1413-8N 8560,6420 r90 top
JTAG1 "JTAG Header" HDR2X3 6929.13,4409.45 r90 top
LED1 "LED" "LED 0805" 6480,2810 r90 top
"LED1_Motor 0" "Fs'" "LED 0805" 11490,3590 r90 top (schematic designator LED1)
"LED1_Motor 1" "Fs'" "LED 0805" 11450,4050 r90 top (schematic designator LED1)
"LED1_Motor 2" "Fs'" "LED 0805" 11490,4510 r90 top (schematic designator LED1)
"LED1_Motor 3" "Fs'" "LED 0805" 11490,4970 r90 top (schematic designator LED1)
"LED1_Motor 4" "Fs'" "LED 0805" 11490,5430 r90 top (schematic designator LED1)
"LED1_Motor 5" "Fs'" "LED 0805" 11490,5890 r90 top (schematic designator LED1)
"LED1_Motor 6" "Fs'" "LED 0805" 11490,6350 r90 top (schematic designator LED1)
"LED1_Motor 7" "Fs'" "LED 0805" 11490,6810 r90 top (schematic designator LED1)
"LED1_Motor 8" "Fs'" "LED 0805" 11490,7270 r90 top (schematic designator LED1)
"LED1_Motor 9" "Fs'" "LED 0805" 11490,7730 r90 top (schematic designator LED1)
"LED1_Motor 10" "Fs'" "LED 0805" 11590,8190 r90 top (schematic designator LED1)
"LED1_Motor 11" "Fs'" "LED 0805" 11640,9760 r90 top (schematic designator LED1)
LED2 "LED" "LED 0805" 6340,2810 r90 top
"LED2_Motor 0" "PWM" "LED 0805" 10090,3590 r90 top (schematic designator LED2)
"LED2_Motor 1" "PWM" "LED 0805" 10090,4050 r90 top (schematic designator LED2)
"LED2_Motor 2" "PWM" "LED 0805" 10090,4510 r90 top (schematic designator LED2)
"LED2_Motor 3" "PWM" "LED 0805" 10090,4970 r90 top (schematic designator LED2)
"LED2_Motor 4" "PWM" "LED 0805" 10090,5430 r90 top (schematic designator LED2)
"LED2_Motor 5" "PWM" "LED 0805" 10090,5890 r90 top (schematic designator LED2)
"LED2_Motor 6" "PWM" "LED 0805" 10090,6350 r90 top (schematic designator LED2)
"LED2_Motor 7" "PWM" "LED 0805" 10090,6810 r90 top (schematic designator LED2)
"LED2_Motor 8" "PWM" "LED 0805" 10090,7270 r90 top (schematic designator LED2)
"LED2_Motor 9" "PWM" "LED 0805" 10090,7730 r90 top (schematic designator LED2)
"LED2_Motor 10" "PWM" "LED 0805" 10090,8190 r90 top (schematic designator LED2)
"LED2_Motor 11" "PWM" "LED 0805" 10100,8700 r90 top (schematic designator LED2)
P1 "+12V" "Male 2X1" 13370,3100 r0 top
P2 "+12V" "Male 2X1" 12850,3100 r0 top
P3 "+5V" "Male 2X1" 12340,3100 r0 top
P4 "+5V" "Male 2X1" 11820,3100 r0 top
P5 "+3.3V" "Male 2X1" 11300,3100 r0 top
P6 "+3.3V" "Male 2X1" 10110,1120 r0 top
P7 "GND" "Male 2X1" 13630,3100 r0 top
P8 "GND" "Male 2X1" 13110,3100 r0 top
P9 "GND" "Male 2X1" 12590,3100 r0 top
P10 "GND" "Male 2X1" 12080,3100 r0 top
P11 "GND" "Male 2X1" 11560,3100 r0 top
P12 "GND" "Male 2X1" 11050,3100 r0 top
P13 "ADC0" HDR1X2 14970,1400 r90 top
P14 "ADC7" HDR1X2 15190,1400 r90 top
P15 "ADC1" HDR1X2 14530,1400 r90 top
P16 "ADC8" HDR1X2 14750,1400 r90 top
P17 "ADC2" HDR1X2 13610,1400 r90 top
P18 "ADC9" HDR1X2 13830,1400 r90 top
P19 "ADC3" HDR1X2 13160,1400 r90 top
P20 "ADC10" HDR1X2 13380,1400 r90 top
P21 "ADC4" HDR1X2 11990,1400 r90 top
P22 "ADC11" HDR1X2 12200,1400 r90 top
P23 "ADC5" HDR1X2 11280,1400 r90 top
P24 "ADC12" HDR1X2 11510,1400 r90 top
P25 "ADC6" HDR1X2 10340,1400 r90 top
P26 "ADC13" HDR1X2 10570,1400 r90 top
P27 "Header 2" HDR1X2 10110,1400 r90 top
R1 "1KOhm" "R 0805 (2012) RESISTOR" 8580,4620 r180 top
R2 "1KOhm" "R 0805 (2012) RESISTOR" 8580,4480 r0 top
R3 "1KOhm" "R 0805 (2012) RESISTOR" 6660,2770 r0 top
"R3_Motor 0" "1KOhm" "R 0805 (2012) RESISTOR" 12250,3590 r90 top (schematic designator R3)
"R3_Motor 1" "1KOhm" "R 0805 (2012) RESISTOR" 12190,4050 r90 top (schematic designator R3)
"R3_Motor 2" "1KOhm" "R 0805 (2012) RESISTOR" 12250,4510 r90 top (schematic designator R3)
"R3_Motor 3" "1KOhm" "R 0805 (2012) RESISTOR" 12250,4970 r90 top (schematic designator R3)
"R3_Motor 4" "1KOhm" "R 0805 (2012) RESISTOR" 12250,5430 r90 top (schematic designator R3)
"R3_Motor 5" "1KOhm" "R 0805 (2012) RESISTOR" 12250,5890 r90 top (schematic designator R3)
"R3_Motor 6" "1KOhm" "R 0805 (2012) RESISTOR" 12250,6350 r90 top (schematic designator R3)
"R3_Motor 7" "1KOhm" "R 0805 (2012) RESISTOR" 12250,6810 r90 top (schematic designator R3)
"R3_Motor 8" "1KOhm" "R 0805 (2012) RESISTOR" 12250,7270 r90 top (schematic designator R3)
"R3_Motor 9" "1KOhm" "R 0805 (2012) RESISTOR" 12250,7730 r90 top (schematic designator R3)
"R3_Motor 10" "1KOhm" "R 0805 (2012) RESISTOR" 12400,8190 r90 top (schematic designator R3)
"R3_Motor 11" "1KOhm" "R 0805 (2012) RESISTOR" 12400,8780 r90 top (schematic designator R3)
R4 "1KOhm" "R 0805 (2012) RESISTOR" 6140,2790 r0 top
"R4_Motor 0" "1KOhm" "R 0805 (2012) RESISTOR" 10860,3590 r90 top (schematic designator R4)
"R4_Motor 1" "1KOhm" "R 0805 (2012) RESISTOR" 10840,4050 r90 top (schematic designator R4)
"R4_Motor 2" "1KOhm" "R 0805 (2012) RESISTOR" 10860,4510 r90 top (schematic designator R4)
"R4_Motor 3" "1KOhm" "R 0805 (2012) RESISTOR" 10860,4970 r90 top (schematic designator R4)
"R4_Motor 4" "1KOhm" "R 0805 (2012) RESISTOR" 10860,5430 r90 top (schematic designator R4)
"R4_Motor 5" "1KOhm" "R 0805 (2012) RESISTOR" 10860,5890 r90 top (schematic designator R4)
"R4_Motor 6" "1KOhm" "R 0805 (2012) RESISTOR" 10860,6350 r90 top (schematic designator R4)
"R4_Motor 7" "1KOhm" "R 0805 (2012) RESISTOR" 10860,6810 r90 top (schematic designator R4)
"R4_Motor 8" "1KOhm" "R 0805 (2012) RESISTOR" 10860,7270 r90 top (schematic designator R4)
"R4_Motor 9" "1KOhm" "R 0805 (2012) RESISTOR" 10860,7730 r90 top (schematic designator R4)
"R4_Motor 10" "1KOhm" "R 0805 (2012) RESISTOR" 10910,8190 r90 top (schematic designator R4)
"R4_Motor 11" "1KOhm" "R 0805 (2012) RESISTOR" 10920,8660 r90 top (schematic designator R4)
R5 "10kOhm" "R 0805 (2012) RESISTOR" 6620,5480 r0 top
R6 "0Ohm" "R 1210 (3225) RESISTOR" 12480,1490 r0 top
R7 "0Ohm" "R 1210 (3225) RESISTOR" 11780,1490 r0 top
R8 "47kOhm" "R 1210 (3225) RESISTOR" 10160,3150 r0 top
R100 "Res1" AXIAL-0.3 2931.17,6838.27 r90 top
R101 "Res1" AXIAL-0.3 2837.71,6838.27 r90 top
T1 "1.8V P-Channel MOSFET" SOT23 14030,2140 r0 top
T2 "1.8V P-Channel MOSFET" SOT23 13660,2140 r0 top
"U1_Motor 0" "MC33886VW" SOP127P1420X340_HS-20N 1980,2145 r0 top (schematic designator U1)
"U1_Motor 1" "MC33886VW" SOP127P1420X340_HS-20N 2980,2145 r0 top (schematic designator U1)
"U1_Motor 2" "MC33886VW" SOP127P1420X340_HS-20N 3980,2145 r0 top (schematic designator U1)
"U1_Motor 3" "MC33886VW" SOP127P1420X340_HS-20N 4980,2145 r0 top (schematic designator U1)
"U1_Motor 4" "MC33886VW" SOP127P1420X340_HS-20N 5980,2145 r0 top (schematic designator U1)
"U1_Motor 5" "MC33886VW" SOP127P1420X340_HS-20N 6980,2145 r0 top (schematic designator U1)
"U1_Motor 6" "MC33886VW" SOP127P1420X340_HS-20N 3990,5855 r180 top (schematic designator U1)
"U1_Motor 7" "MC33886VW" SOP127P1420X340_HS-20N 4990,5855 r180 top (schematic designator U1)
"U1_Motor 8" "MC33886VW" SOP127P1420X340_HS-20N 5990,5855 r180 top (schematic designator U1)
"U1_Motor 9" "MC33886VW" SOP127P1420X340_HS-20N 6990,5855 r180 top (schematic designator U1)
"U1_Motor 10" "MC33886VW" SOP127P1420X340_HS-20N 1990,5855 r180 top (schematic designator U1)
"U1_Motor 11" "MC33886VW" SOP127P1420X340_HS-20N 2990,5855 r180 top (schematic designator U1)
U2 "Hex Inv1" DW020_N 7660,3580 r180 top
U3 "Hex Inv2" DW020_N 7600,4840 r180 top
U4 "LTC4412" SOT95P245X110-6N 14220,2130 r0 top
U5 "LTC4412" SOT95P245X110-6N 13850,2130 r0 top
UC_RESET1 "IT-2175" IT-2175 10520,3960 r90 top
USB1 "87520" 87520-0010BLF 9500,5280 r90 top
W1 "Jumper" RAD-0.2 8340,5460 r180 top
W2 "Jumper" RAD-0.2 8340,5680 r0 top
Y1 "ECS-160-20-5P" CSM-7 8820,3360 r0 top

## Footprints (in the part's own frame and the unit in brackets; to place one, negate y for a bottom-side part, rotate by r counter-clockwise, add the part's x,y. Pads: shape width x height; smd on the part's side, far side on the other; paste and mask are expansions set on the pad)
"24-POS 5566" [mm]
  round 0 hole 3: 0(-2,7.09) 0(53.6,7.09)
  round 2.3 hole 1.4: 1(48.892,2.057) 2(44.692,2.057) 3(40.492,2.057) 4(36.292,2.057) 5(32.092,2.057) 6(27.892,2.057) 7(23.692,2.057) 8(19.492,2.057) 9(15.292,2.057) 10(11.092,2.057) 11(6.892,2.057) 12(2.692,2.057) 13(48.915,7.55) 14(44.715,7.55) 15(40.515,7.55) 16(36.315,7.55) 17(32.115,7.55) 18(27.915,7.55) 19(23.715,7.55) 20(19.515,7.55) 21(15.315,7.55) 22(11.115,7.55) 23(6.915,7.55) 24(2.715,7.55)
  silkscreen extent 0,0 51.64,11.35, body extent -2.97,-0.15 54.63,10.95, height 12.8
"0805 (2012) Capacitor" [mm] "0805 (2012) Capacitor"
  rect 0.85x1.4 smd: 1(-1.075,0) 2(1.075,0)
  silkscreen extent -1.78,-0.95 1.78,0.95, body extent -1.19,-0.65 1.19,0.65, height 0.85
5566-4 [mm]
  round 2.3 hole 1.4: 1(-2.159,0) 2(2.032,0) 3(2.032,5.461) 4(-2.159,5.461)
  silkscreen extent -5.33,-4.06 5.21,7.87, body extent -5.33,-3.25 5.07,7.75, height 12.8
"5569 Mini-Fit Jr 2-Pos Right Angle w/ PCB Mounting Flange" [mm] "4.20mm (.165\") Pitch Mini-Fit Jr.™ Header, Dual Row, Right Angle, with PCB Mounting Flange, 2 Circuits, PA Polyamide Nylon 6/6 94V-0, Tin (Sn) Plating"
  round 2.54 hole 1.8 unplated: 1(0,0) 2(0,5.461)
  round 0 hole 3.2 unplated: ""(-4.572,-4.191) ""(4.5,-4.2)
  silkscreen extent -8.13,-13.97 8.13,7.11, body extent -7.67,-13.95 7.73,5.95, height 11.4
87520-0010BLF [mm] "USB Type A Connector - PCB Mount Through Hole Right Angle"
  round 1.5 hole 0.92: 1(-3.5,0) 2(-1,0.025) 3(1,0) 4(3.5,0.05)
  round 3 hole 2.3: CASE(-6.575,-2.7) CASE(6.575,-2.7)
  silkscreen extent -6.55,-13.1 6.55,0.9, body extent -6.5,-13 6.5,1, height 7.7
AXIAL-0.3 [mm] "Axial Device, Thru-Hole; 2 Leads; 0.3 in Pin Spacing"
  round 1.4 hole 0.85: 1(-3.81,0) 2(3.81,0)
  silkscreen extent -2.77,-0.76 2.77,0.76
CSM-7 [mm] "Quartz Crystal, SM; 2 Leads; Body 11.4 x 4.8 x 5 mm (LxWxH)"
  rect 4.5x1.5 smd: 1(-4.25,0) 2(4.25,0)
  silkscreen extent -5.75,-2.5 5.75,2.5
DW020_N [mm] "SOIC, 20-Leads, Body 12.8x7.5mm, Pitch 1.27mm, IPC Medium Density"
  oval 2.3x0.6 smd: 1(-4.55,5.715) 2(-4.55,4.445) 3(-4.55,3.175) 4(-4.55,1.905) 5(-4.55,0.635) 6(-4.55,-0.635) 7(-4.55,-1.905) 8(-4.55,-3.175) 9(-4.55,-4.445) 10(-4.55,-5.715) 11(4.55,-5.715) 12(4.55,-4.445) 13(4.55,-3.175) 14(4.55,-1.905) 15(4.55,-0.635) 16(4.55,0.635) 17(4.55,1.905) 18(4.55,3.175) 19(4.55,4.445) 20(4.55,5.715)
  silkscreen extent -4.67,-6.5 3,6.69, body extent -3.75,-6.5 3.75,6.5, height 2.65
HDR1X2 [mm]
  rect 1.5x1.5 hole 0.9: 1(0,0)
  round 1.5 hole 0.9: 2(2.54,0)
  silkscreen extent -1.27,-1.27 3.81,1.27
HDR2X3 [mm] "Connector; Header; 3x2 Position"
  rect 1.5x1.5 hole 0.9: 1(0,0)
  round 1.5 hole 0.9: 2(0,2.54) 3(2.54,0) 4(2.54,2.54) 5(5.08,0) 6(5.08,2.54)
  silkscreen extent -1.27,-1.27 6.35,3.81
IT-2175 [mm] "Switch, Push Button, Thru-Hole; 4 Leads; Body 8.5 x 8.5 mm (LxW typ); Row Spacing 9.0 mm; Pitch 4.5 mm"
  rect 1.65x1.65 hole 1: 1(-4.5,-2.25)
  round 1.65 hole 1: 2(4.5,-2.25) 3(-4.5,2.25) 4(4.5,2.25)
  silkscreen extent -4.25,-4.25 4.25,4.25
"LED 0805" [mm]
  rect 1.15x1.3 smd: 1(-1,0) 2(1,0)
  silkscreen extent -2.12,-0.9 1.83,0.9, body extent -1,-0.63 1,0.62, height 0.8
LMZ23610 [mm]
  rect 0.86x2.41 smd: 0(20,10) 1(21.27,10) 2(22.54,10) 3(23.81,10) 4(25.08,10) 5(26.35,10) 6(27.62,10) 7(28.89,10) 8(30.16,10) 9(31.43,10) 10(32.7,10)
  rect 9.126x13.37 smd: 11(26.35,19.6)
"Male 2X1" [mil]
  oct 60x85 hole 35: 1(0,0) 2(100,0)
  silkscreen extent -50,-50 150,50, body extent -50,-50 150,50, height 460
"R 0805 (2012) RESISTOR" [mm] "0805 (2012) Resistor"
  rect 0.85x1.4 smd: 1(-1.075,0) 2(1.075,0)
  silkscreen extent -1.78,-0.95 1.78,0.95, body extent -1.19,-0.65 1.19,0.65, height 0.85
"R 1210 (3225) RESISTOR" [mm] "1210 (3225) Resistor"
  rect 0.95x2.8 smd: 1(-1.725,0) 2(1.725,0)
  silkscreen extent -2.45,-1.63 2.45,1.65, body extent -1.83,-1.43 1.83,1.43, height 1.81
RAD-0.2 [mm] "Jumper Wire; 2 Leads"
  round 1.2 hole 0.7: 1(-2.54,0) 2(2.54,0)
  silkscreen extent -4.44,-1.91 4.44,1.91
RAD-0.3 [mm] "Radial Cap, Thru-Hole; 2 Leads; 0.3 in Pin Spacing"
  round 1.2 hole 0.7: 1(-3.81,0) 2(3.81,0)
  silkscreen extent -5.71,-1.91 5.71,1.91
Radial_6.3mmDia_SM_D [mm] "Surface Mount Aluminum Electrolytic Capacitor"
  rect 2.9x0.65 smd: N(-2.35,0) P(2.35,0)
  silkscreen extent -3.3,-3.3 3.3,3.3, body extent -3.16,-3.16 3.16,3.16, height 5.8
Radial_8mmDia_SM_E [mm] "Surface Mount Aluminum Electrolytic Capacitor"
  rect 3.7x0.65 smd: N(-2.95,0) P(2.95,0)
  silkscreen extent -4.08,-4 4.58,4.03, body extent -3.99,-3.99 4.04,4.04, height 6.2
SMB [mm] "DO-214-AA/SMB; 2 C-Bend Leads; Body 5.3 x 3.6 mm, inc. leads (LxW)"
  rect 2.3x2.3 smd: 1(-2.25,0) 2(2.25,0)
  silkscreen extent -3.8,-1.55 4.1,1.55
SOP65P780X200-28N [mm] "SOP, 28-Leads, Body 10.5x5.6mm (max), Pitch 0.65mm, IPC Medium Density"
  rect 2.1x0.45 smd: 1(-3.45,4.225) 2(-3.45,3.575) 3(-3.45,2.925) 4(-3.45,2.275) 5(-3.45,1.625) 6(-3.45,0.975) 7(-3.45,0.325) 8(-3.45,-0.325) 9(-3.45,-0.975) 10(-3.45,-1.625) 11(-3.45,-2.275) 12(-3.45,-2.925) 13(-3.45,-3.575) 14(-3.45,-4.225) 15(3.45,-4.225) 16(3.45,-3.575) 17(3.45,-2.925) 18(3.45,-2.275) 19(3.45,-1.625) 20(3.45,-0.975) 21(3.45,-0.325) 22(3.45,0.325) 23(3.45,0.975) 24(3.45,1.625) 25(3.45,2.275) 26(3.45,2.925) 27(3.45,3.575) 28(3.45,4.225)
  silkscreen extent -3.57,-5.25 2,5.25, body extent -2.8,-5.25 2.8,5.25, height 2
SOP127P1420X340_HS-20N [mm] "SOP, 20-Leads, Body 11.1x7.5mm (max), Pitch 1.27mm, IPC Medium Density"
  rect 2.1x0.65 smd: 1(-6.6,5.715) 2(-6.6,4.445) 3(-6.6,3.175) 4(-6.6,1.905) 5(-6.6,0.635) 6(-6.6,-0.635) 7(-6.6,-1.905) 8(-6.6,-3.175) 9(-6.6,-4.445) 10(-6.6,-5.715) 11(6.6,-5.715) 12(6.6,-4.445) 13(6.6,-3.175) 14(6.6,-1.905) 15(6.6,-0.635) 16(6.6,0.635) 17(6.6,1.905) 18(6.6,3.175) 19(6.6,4.445) 20(6.6,5.715)
  rect 7.5x13 smd: 21(0,0)
  silkscreen extent -6.72,-5.55 5.15,6.71, body extent -3.75,-5.55 3.75,5.55, height 3.4
SOP254P1740X1413-8N [mm] "SOP, 8-Leads, Body 17.5x14.6mm (max), Pitch 2.54mm, IPC Medium Density"
  rect 1.8x1.5 smd: 1(-8.4,3.81) 2(-8.4,1.27) 3(-8.4,-1.27) 4(-8.4,-3.81) 5(8.4,-3.81) 6(8.4,-1.27) 7(8.4,1.27) 8(8.4,3.81)
  silkscreen extent -8.52,-8.75 7.1,8.75, body extent -7.27,-8.73 7.28,8.73, height 14.13
SOT23 [mm]
  rect 0.8x0.9 smd: 1(0.95,1) 2(-0.95,1) 3(0,-1)
  silkscreen extent -1.53,-0.7 1.53,0.7, body extent -1.52,-0.7 1.52,0.7, height 1.11
SOT95P245X110-6N [mm] "SOT23, 6-Leads, Body 3.0x2.6mm (max), Pitch 0.95mm, IPC Medium Density"
  rect 1.1x0.55 smd: 1(-1,0.95) 2(-1,0) 3(-1,-0.95) 4(1,-0.95) 5(1,0) 6(1,0.95)
  silkscreen extent -1.12,-1.5 0.05,1.9, body extent -0.7,-1.5 0.7,1.5, height 1.1
TSQFP50P1600X1600X120-100N [mm] "TSQFP, 100-Leads, Body 16.3x16.3mm (max), Pitch 0.50mm, IPC Medium Density"
  oval 1.8x0.3 smd: 1(-7.55,6) 2(-7.55,5.5) 3(-7.55,5) 4(-7.55,4.5) 5(-7.55,4) 6(-7.55,3.5) 7(-7.55,3) 8(-7.55,2.5) 9(-7.55,2) 10(-7.55,1.5) 11(-7.55,1) 12(-7.55,0.5) 13(-7.55,0) 14(-7.55,-0.5) 15(-7.55,-1) 16(-7.55,-1.5) 17(-7.55,-2) 18(-7.55,-2.5) 19(-7.55,-3) 20(-7.55,-3.5) 21(-7.55,-4) 22(-7.55,-4.5) 23(-7.55,-5) 24(-7.55,-5.5) 25(-7.55,-6) 51(7.55,-6) 52(7.55,-5.5) 53(7.55,-5) 54(7.55,-4.5) 55(7.55,-4) 56(7.55,-3.5) 57(7.55,-3) 58(7.55,-2.5) 59(7.55,-2) 60(7.55,-1.5) 61(7.55,-1) 62(7.55,-0.5) 63(7.55,0) 64(7.55,0.5) 65(7.55,1) 66(7.55,1.5) 67(7.55,2) 68(7.55,2.5) 69(7.55,3) 70(7.55,3.5) 71(7.55,4) 72(7.55,4.5) 73(7.55,5) 74(7.55,5.5) 75(7.55,6)
  oval 0.3x1.8 smd: 26(-6,-7.55) 27(-5.5,-7.55) 28(-5,-7.55) 29(-4.5,-7.55) 30(-4,-7.55) 31(-3.5,-7.55) 32(-3,-7.55) 33(-2.5,-7.55) 34(-2,-7.55) 35(-1.5,-7.55) 36(-1,-7.55) 37(-0.5,-7.55) 38(0,-7.55) 39(0.5,-7.55) 40(1,-7.55) 41(1.5,-7.55) 42(2,-7.55) 43(2.5,-7.55) 44(3,-7.55) 45(3.5,-7.55) 46(4,-7.55) 47(4.5,-7.55) 48(5,-7.55) 49(5.5,-7.55) 50(6,-7.55) 76(6,7.55) 77(5.5,7.55) 78(5,7.55) 79(4.5,7.55) 80(4,7.55) 81(3.5,7.55) 82(3,7.55) 83(2.5,7.55) 84(2,7.55) 85(1.5,7.55) 86(1,7.55) 87(0.5,7.55) 88(0,7.55) 89(-0.5,7.55) 90(-1,7.55) 91(-1.5,7.55) 92(-2,7.55) 93(-2.5,7.55) 94(-3,7.55) 95(-3.5,7.55) 96(-4,7.55) 97(-4.5,7.55) 98(-5,7.55) 99(-5.5,7.55) 100(-6,7.55)
  silkscreen extent -7.67,-6.25 6.25,6.82, body extent -7,-7 7,7, height 1.2

## Part data
"12V Out" "24V In" "24V Out" Con5: "4.20mm (.165\") Pitch Mini-Fit Jr.™ Header, Dual Row, Vertical, without Snap-in Plastic Peg PCB Lock, 4 Circuits, PA Polyamide Nylon 6/6 94V-2, Tin (Sn) Plating, without Drain Holes"
* FTDI "Internal Pressure Sensor": library part Component_1
ATX1: library part 39-29-9244, "ATX 24 pin connector"
C1 C2 C3 C6 C7 C8 C100 C101 C102 C103 C104 C105 C106: "Capacitor"
C4 C5 "C9_Motor 0" "C9_Motor 1" "C9_Motor 2" "C9_Motor 3" "C9_Motor 4" "C9_Motor 5" "C9_Motor 6" "C9_Motor 7" "C9_Motor 8" "C9_Motor 9" "C9_Motor 10" "C9_Motor 11" "C13_Motor 0" "C13_Motor 1" "C13_Motor 2" "C13_Motor 3" "C13_Motor 4" "C13_Motor 5" "C13_Motor 6" "C13_Motor 7" "C13_Motor 8" "C13_Motor 9" "C13_Motor 10" "C13_Motor 11" "C14_Motor 0" "C14_Motor 1" "C14_Motor 2" "C14_Motor 3" "C14_Motor 4" "C14_Motor 5" "C14_Motor 6" "C14_Motor 7" "C14_Motor 8" "C14_Motor 9" "C14_Motor 10" "C14_Motor 11" C23 C24 C25 C26: library part "Capacitor (non-polarized)", "Capacitor"
"C10_Motor 0" "C10_Motor 1" "C10_Motor 2" "C10_Motor 3" "C10_Motor 4" "C10_Motor 5" "C10_Motor 6" "C10_Motor 7" "C10_Motor 8" "C10_Motor 9" "C10_Motor 10" "C10_Motor 11" "C11_Motor 0" "C11_Motor 1" "C11_Motor 2" "C11_Motor 3" "C11_Motor 4" "C11_Motor 5" "C11_Motor 6" "C11_Motor 7" "C11_Motor 8" "C11_Motor 9" "C11_Motor 10" "C11_Motor 11" "C12_Motor 0" "C12_Motor 1" "C12_Motor 2" "C12_Motor 3" "C12_Motor 4" "C12_Motor 5" "C12_Motor 6" "C12_Motor 7" "C12_Motor 8" "C12_Motor 9" "C12_Motor 10" "C12_Motor 11" C17 C18 C19 C20 C21 C22: library part "Capacitor (polarized)", "Capacitor (polarized)"
Con1 Con3 Con4 Con7 Con8 Con9: library part 5566-4, "4.20mm (.165\") Pitch Mini-Fit Jr.™ Header, Dual Row, Vertical, without Snap-in Plastic Peg PCB Lock, 4 Circuits, PA Polyamide Nylon 6/6 94V-2, Tin (Sn) Plating, without Drain Holes"
"Con2_Motor 0" "Con2_Motor 1" "Con2_Motor 2" "Con2_Motor 3" "Con2_Motor 4" "Con2_Motor 5" "Con2_Motor 6" "Con2_Motor 7" "Con2_Motor 8" "Con2_Motor 9" "Con2_Motor 10" "Con2_Motor 11" Con6: library part "5569 Mini-Fit Jr 2-Pos Right Angle"
"D1_Motor 0" "D1_Motor 1" "D1_Motor 2" "D1_Motor 3" "D1_Motor 4" "D1_Motor 5" "D1_Motor 6" "D1_Motor 7" "D1_Motor 8" "D1_Motor 9" "D1_Motor 10" "D1_Motor 11" "D2_Motor 0" "D2_Motor 1" "D2_Motor 2" "D2_Motor 3" "D2_Motor 4" "D2_Motor 5" "D2_Motor 6" "D2_Motor 7" "D2_Motor 8" "D2_Motor 9" "D2_Motor 10" "D2_Motor 11": library part "D Schottky", "Schottky Diode"
JTAG1: library part "Header 3X2", "Header, 3-Pin, Dual row"
LED1 LED2: "Standard LED"
"LED1_Motor 0" "LED1_Motor 1" "LED1_Motor 2" "LED1_Motor 3" "LED1_Motor 4" "LED1_Motor 5" "LED1_Motor 6" "LED1_Motor 7" "LED1_Motor 8" "LED1_Motor 9" "LED1_Motor 10" "LED1_Motor 11" "LED2_Motor 0" "LED2_Motor 1" "LED2_Motor 2" "LED2_Motor 3" "LED2_Motor 4" "LED2_Motor 5" "LED2_Motor 6" "LED2_Motor 7" "LED2_Motor 8" "LED2_Motor 9" "LED2_Motor 10" "LED2_Motor 11": library part LED, "Standard LED"
P1 P2 P3 P4 P5 P6 P7 P8 P9 P10 P11 P12 P13 P14 P15 P16 P17 P18 P19 P20 P21 P22 P23 P24 P25 P26: library part "Header 2", "Header, 2-Pin"
P27: "Header, 2-Pin"
R1 R2 R3 "R3_Motor 0" "R3_Motor 1" "R3_Motor 2" "R3_Motor 3" "R3_Motor 4" "R3_Motor 5" "R3_Motor 6" "R3_Motor 7" "R3_Motor 8" "R3_Motor 9" "R3_Motor 10" "R3_Motor 11" R4 "R4_Motor 0" "R4_Motor 1" "R4_Motor 2" "R4_Motor 3" "R4_Motor 4" "R4_Motor 5" "R4_Motor 6" "R4_Motor 7" "R4_Motor 8" "R4_Motor 9" "R4_Motor 10" "R4_Motor 11" R5 R6 R7 R8: library part Resistor, "Resistor"
R100 R101: "Resistor"
T1 T2: library part Transistor
"U1_Motor 0" "U1_Motor 1" "U1_Motor 2" "U1_Motor 3" "U1_Motor 4" "U1_Motor 5" "U1_Motor 6" "U1_Motor 7" "U1_Motor 8" "U1_Motor 9" "U1_Motor 10" "U1_Motor 11": "Motor Controller"
U2 U3: library part SN74HCT540DW, "Octal Buffer and Line Driver with 3-State Outputs"
U4 U5: "Low Loss Power Path Controller in Thin SOT"
UC_RESET1: "Tactile Switch, DPST; Thru-Hole; Vertical; Rating DC 12V, 50mA (max)"
USB1: "87520 USB Through Hole Type A Right Angle Receptacle"
W1 W2: "Jumper Wire"
Y1: library part ECS-120-32-1, "Crystal Oscillator"

## Free pads (board coordinates)
  rect 0x0 hole 250: 0(9500,6500) 1(9500,1500) 3(1500,6500)

## Via types
v1: diameter 30, hole 15, Top Layer to Bottom Layer, tented top, 792 vias
v2: diameter 50, hole 28, Top Layer to Bottom Layer, 109 vias
v3: diameter 39.37, hole 28, Top Layer to Bottom Layer, 2 vias

## Nets (pads, with @x,y where several pads share a name; then routed paths per layer and width w, separated by ;. In a path a pad name is that pad's centre, name@x,y a point inside that pad or via, vN(x,y) a via of type N, cw(c..) or ccw(c..) an arc to the next point about the centre after c; other vN are vias at no path point)
+3.3V: ATX1.1 ATX1.2 ATX1.12 ATX1.13 P5.1 P5.2 P6.1 P6.2
+5V: "Internal Pressure Sensor.6" "R3_Motor 0.2" "R3_Motor 1.2" "R3_Motor 2.2" "R3_Motor 3.2" "R3_Motor 4.2" "R3_Motor 5.2" "R3_Motor 6.2" "R3_Motor 7.2" "R3_Motor 8.2" "R3_Motor 9.2" "R3_Motor 10.2" "R3_Motor 11.2" *.100 ATX1.4 ATX1.6 ATX1.21 ATX1.22 ATX1.23 BIG$$.9 BIG$$.10 C1.2 C2.2 C3.2 C5.1 C100.2 C101.2 C102.2 Con1.1 Con3.1 Con4.1 FTDI.19 P3.1 P3.2 P4.1 P4.2 R3.2 R4.2 R6.2 R7.1 R101.2 U2.20 U3.20 USB1.1
"+5V STDBY": ATX1.9
+12V: "12V Out.1" "12V Out.4" ATX1.10 ATX1.11 P1.1 P1.2 P2.1 P2.2